# Altium PCB PCB_fina.pcbdoc
Units mil, origin at the board's own origin, x right, y up, seen from the top; angles counter-clockwise.
Board outline 3397.5 x 2742.17 mil, 2 copper layers (Top Layer, Bottom Layer); 12 components, 41 nets, 92 pads, 21 vias.
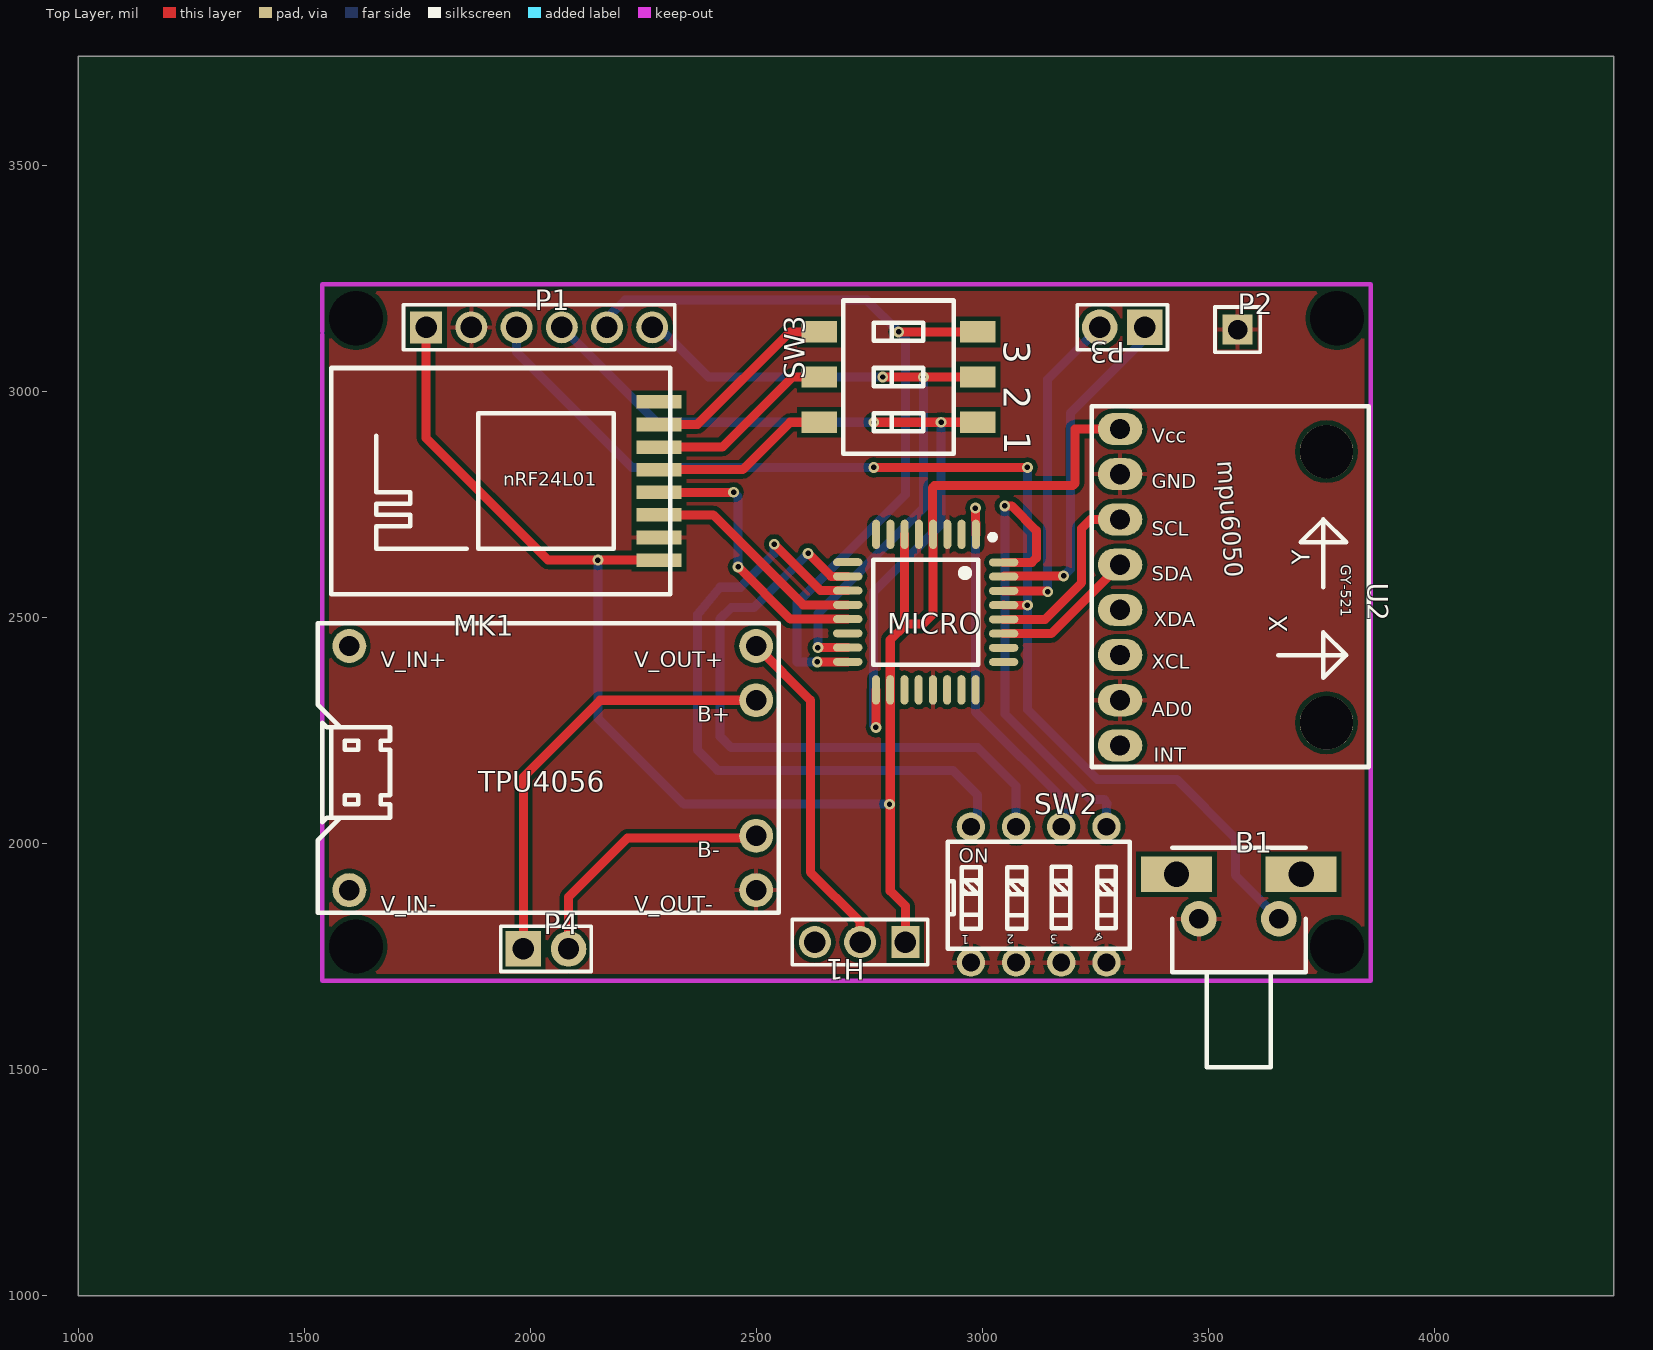
[diagram p0: Top Layer view]
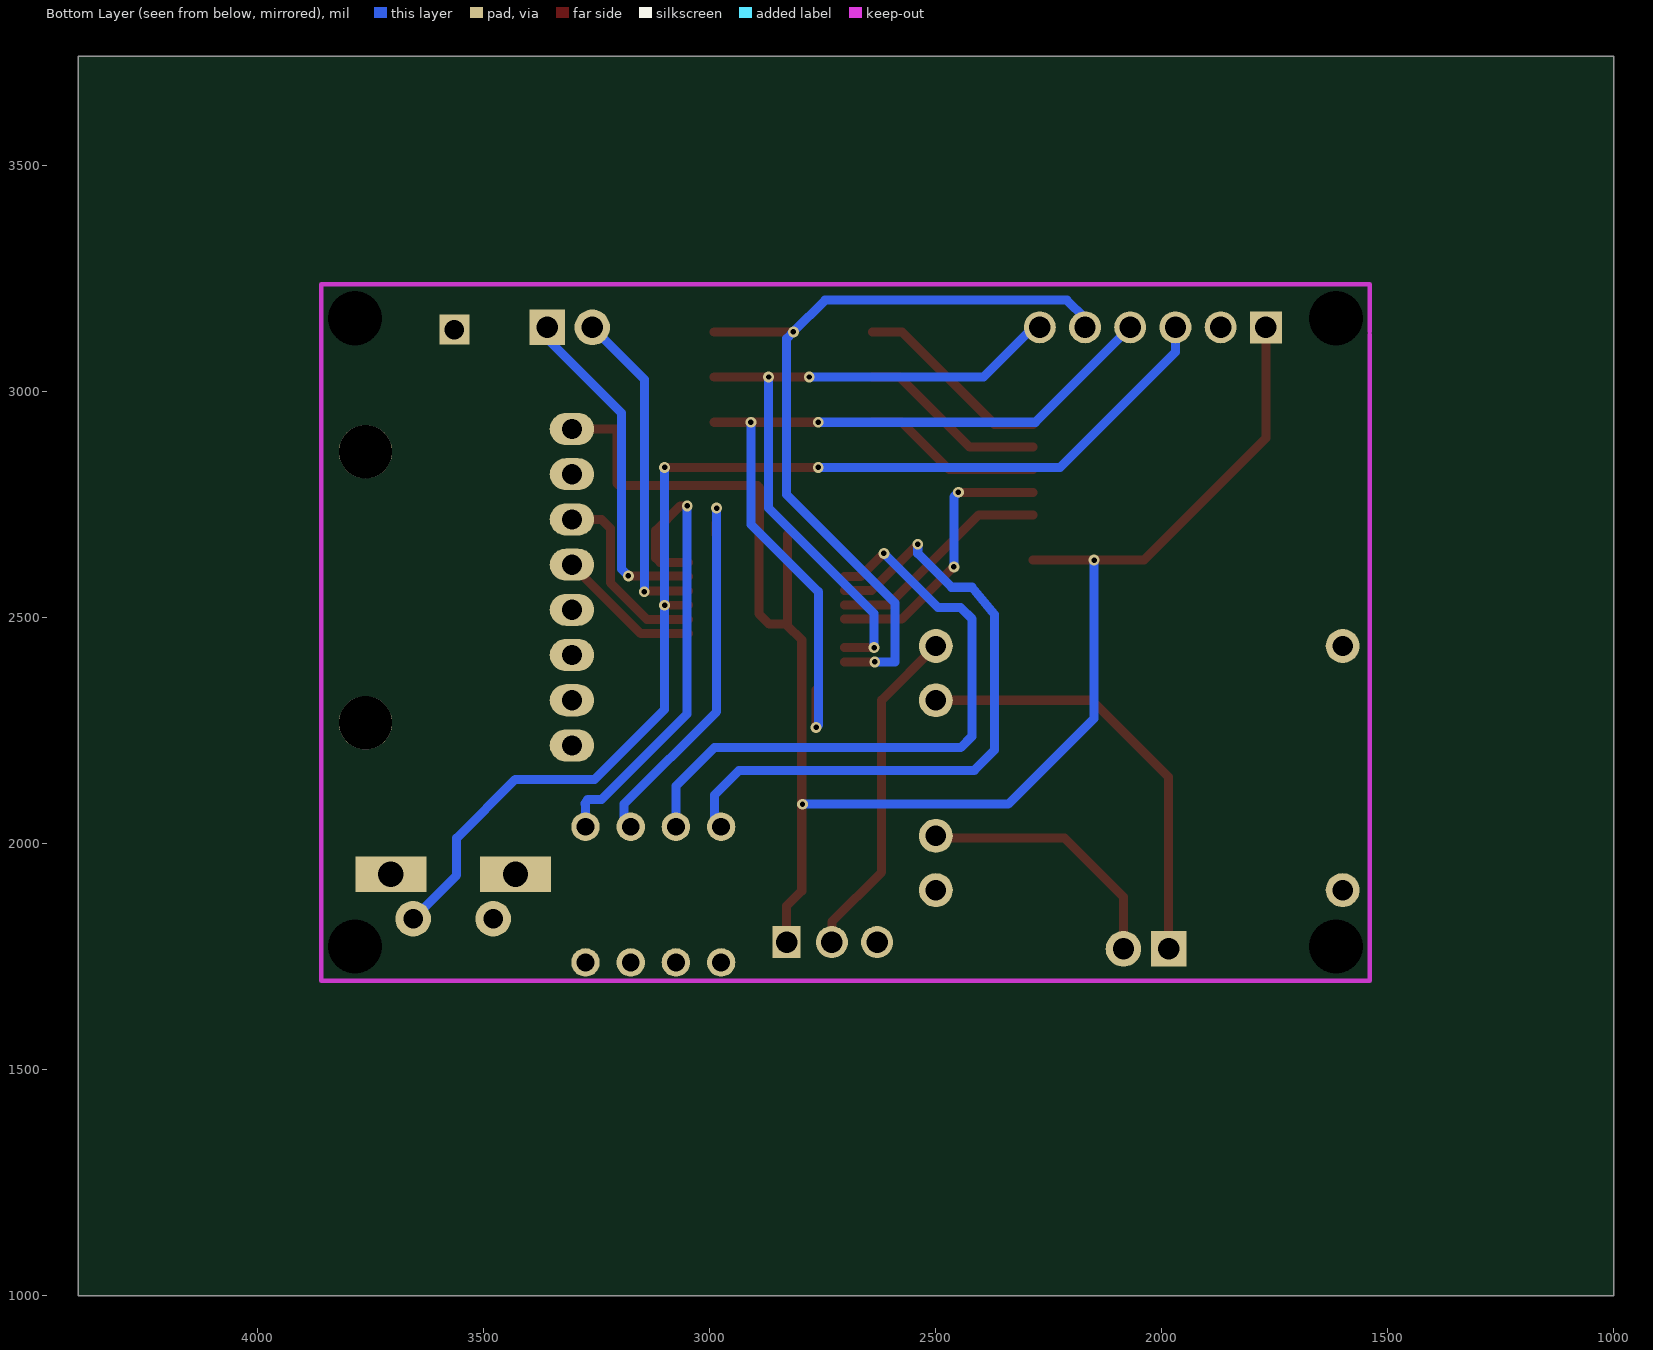
[diagram p1: Bottom Layer view, seen from below]

## Layer stack, top to bottom
Top Solder: solder mask 0.4, Solder Resist, Dk 3.5
Top Layer: signal copper 1.4
Dielectric1: dielectric 12.6, FR-4, Dk 4.8
Bottom Layer: signal copper 1.4
Bottom Solder: solder mask 0.4, Solder Resist, Dk 3.5

## Board outline
4397.5,1000 1000,1000 1000,3742.17 4397.5,3742.17

## Design rules (kind name [scope] priority, off if disabled: settings)
Clearance [All] p1: gap=10 ignorepadtopadclearanceinfootprint=FALSE except(0: Arc-Hole Track-Hole SMDPad-Hole THPad-Hole Via-Hole Fill-Hole Poly-Hole Region-Hole Text-Hole)
PolygonConnect [All] p1: connectstyle=Relief reliefconductorwidth=10 reliefentries=4 polygonreliefangle="90 Angle" airgapwidth=10
RoutingVias [All] p1: holewidth=28 width=50 viastyle="Through Hole" minholewidth=28 minwidth=50 maxholewidth=28 maxwidth=50
SolderMaskExpansion [All] p1: expansion=4 istentingtop=FALSE
Width [All] p1: maxlimit=10 minlimit=10 preferedwidth=10
30 further rules are at their usual default settings.

## Components (designator, comment, footprint, x,y, rotation, side; value= is the part's Value field where it differs from the comment)
B1 "PB-TH-RA" PB-TH-RA 3430,1932.17 r0 top
H1 "Header-Male-2.54_1x3" HDR-TH_3P-P2.54-V 2730,1782.17 r180 top
MICRO "ATMEGA8A-AU" TQFP-32_L7.0-W7.0-P0.80-LS9.0-BL 2875,2512.17 r180 top
MK1 "nrf24l01 smd" NRF24L01_SMD+ 2285,2802.17 r180 top
P1 "Header-Female-2.54_1x6" HDR-TH_6P-P2.54-V-F 2020,3142.17 r0 top
P2 "Header-Male-2.54_1x1" HDR-TH_1P-P2.54-V-M 3565,3137.17 r0 top
P3 "2.54mm 1*2P" HDR-TH_2P-P2.54-V-M 3310,3142.17 r180 top
P4 "2.54mm 1*2P" HDR-TH_2P-P2.54-V-M 2035,1767.17 r0 top
SW2 "DIP switchEI-04" SW-TH_DIPSWITCHEI-04 3125,1887.17 r0 top
SW3 "DIP_SWITCH_3_SMD" DIP-SWITCH-3_SMD 2815,3032.17 r90 top
TPU4056 "TP4056 MODULE" TP4056 1530,2487.17 r0 top
U2 "GY-521" GY-521 3305,2917.17 r270 top

## Footprints (in the part's own frame and the unit in brackets; to place one, negate y for a bottom-side part, rotate by r counter-clockwise, add the part's x,y. Pads: shape width x height; smd on the part's side, far side on the other; paste and mask are expansions set on the pad)
DIP-SWITCH-3_SMD [mm]
  rect 1.2x2 smd: 1(-2.54,-4.45) 2(0,-4.45) 3(2.54,-4.45) 4(2.54,4.45) 5(0,4.45) 6(-2.54,4.45)
  silkscreen extent -4.3,-3.1 4.3,3.1
GY-521 [mm]
  oval 1.8x2.5 hole 1.143: 1(0,0) 2(2.54,0) 3(5.08,0) 4(7.62,0) 5(10.16,0) 6(12.7,0) 7(15.24,0) 8(17.78,0)
  round 3 hole 3 unplated: ""(1.27,11.6) ""(16.51,11.6)
  silkscreen extent -1.27,-1.59 18.99,13.97
HDR-TH_1P-P2.54-V-M [mm]
  rect 1.7x1.7 hole 1.1: 1(0,0)
  silkscreen extent -1.27,-1.27 1.27,1.27
HDR-TH_2P-P2.54-V-M [mm]
  rect 2x2 hole 1.2: 1(-1.27,0)
  round 2 hole 1.2: 2(1.27,0)
  silkscreen extent -2.54,-1.27 2.54,1.27
HDR-TH_3P-P2.54-V [mm]
  rect 1.575x1.8 hole 1.2: 1(-2.54,0)
  round 1.8 hole 1.2: 2(0,0) 3(2.54,0)
  silkscreen extent -3.81,-1.27 3.81,1.27
HDR-TH_6P-P2.54-V-F [mm]
  rect 1.8x1.8 hole 1.2: 1(-6.35,0)
  round 1.8 hole 1.2: 2(-3.81,0) 3(-1.27,0) 4(1.27,0) 5(3.81,0) 6(6.35,0)
  silkscreen extent -7.62,-1.27 7.62,1.27
NRF24L01_SMD+ [mil]
  rect 100x30 smd: 1(0,175) 2(0,125) 3(0,75) 4(0,25) 5(0,-25) 6(0,-75) 7(0,-125) 8(0,-175)
  silkscreen extent -25,-250 725,250
PB-TH-RA [mm]
  round 2 hole 1.1: 1(1.25,-2.5) 2(5.75,-2.5)
  rect 4x2 hole 1.422: 3(7,0) 4(0,0)
  silkscreen extent -0.25,-10.85 7.25,1.5
SW-TH_DIPSWITCHEI-04 [mm]
  round 1.6 hole 1: 1(-3.81,-3.81) 2(-1.27,-3.81) 3(1.27,-3.81) 4(3.81,-3.81) 5(3.81,3.81) 6(1.27,3.81) 7(-1.27,3.81) 8(-3.81,3.81)
  silkscreen extent -5.1,-3.05 5.11,2.98
TP4056 [mil]
  round 75 hole 45: 1(70,-50) 2(70,-590) 3(970,-170) 4(970,-470) 5(970,-50) 6(970,-590)
  silkscreen extent 0,-640 1020,0
TQFP-32_L7.0-W7.0-P0.80-LS9.0-BL [mm]
  oval 0.45x1.65 smd: 1(-2.817,-4.369) 2(-2.017,-4.369) 3(-1.217,-4.369) 4(-0.417,-4.369) 5(0.381,-4.369) 6(1.181,-4.369) 7(1.981,-4.369) 8(2.781,-4.369) 17(2.791,4.369) 18(1.991,4.369) 19(1.191,4.369) 20(0.391,4.369) 21(-0.406,4.369) 22(-1.207,4.369) 23(-2.007,4.369) 24(-2.807,4.369)
  oval 1.65x0.45 smd: 9(4.381,-2.804) 10(4.381,-2.004) 11(4.381,-1.204) 12(4.381,-0.404) 13(4.381,0.394) 14(4.381,1.194) 15(4.381,1.994) 16(4.381,2.794) 25(-4.381,2.804) 26(-4.381,2.004) 27(-4.381,1.204) 28(-4.381,0.404) 29(-4.381,-0.394) 30(-4.381,-1.194) 31(-4.381,-1.994) 32(-4.381,-2.794)
  silkscreen extent -3.91,-4.36 2.94,2.95

## Free pads (board coordinates)
  round 60 hole 120: 1(1615,1772.17) 1(1615,3162.17) 1(3785,1772.17) 1(3785,3162.17)

## Via types
v1: diameter 24, hole 12, Top Layer to Bottom Layer, 21 vias

## Nets (pads, with @x,y where several pads share a name; then routed paths per layer and width w, separated by ;. In a path a pad name is that pad's centre, name@x,y a point inside that pad or via, vN(x,y) a via of type N, cw(c..) or ccw(c..) an arc to the next point about the centre after c; other vN are vias at no path point)
GND: B1.1 MICRO.3 MICRO.5 MICRO.21 MK1.2 P1.2 P2.1 SW2.1 SW2.2 SW2.3 SW2.4 TPU4056.6 U2.2 U2.7
H1_3: H1.3
MICRO_1: MICRO.1 SW2.6 | length 854.1
  Top Layer w20: v1(2985,2742.17) MICRO.1
  Bottom Layer w20: v1(2985,2742.17) 2985,2292.17 3190,2087.17 3190,2052.17 SW2.6
MICRO_2: MICRO.2
MICRO_7: MICRO.7
MICRO_8: MICRO.8
MICRO_9: MICRO.9
MICRO_10: MICRO.10 SW2.7 | length 1414.3
  Top Layer w20: v1(2615,2642.17) 2666.1,2591.07 MICRO.10
  Bottom Layer w20: v1(2615,2642.17) 2495,2522.17 2445,2522.17 2420,2497.17 2420,2237.17 2445,2212.17 2990,2212.17 3075,2127.17 SW2.7
MICRO_11: MICRO.11 SW2.8 | length 1491.8
  Top Layer w20: v1(2540,2662.17) 2642.6,2559.57 MICRO.11
  Bottom Layer w20: v1(2540,2662.17) 2540,2642.17 2465,2567.17 2425,2567.17 2420,2567.17 2370,2507.17 2370,2207.17 2415,2162.17 2935,2162.17 2990,2107.17 2990,2052.17 SW2.8
MICRO_14: MICRO.14
MICRO_15: MICRO.15 P1.6 SW3.2 | length 1527
  Top Layer w20: v1(2636.5,2433.67) MICRO.15 ; v1(2780,3032.17) v1(2870,3032.17) SW3.2
  Bottom Layer w20: P1.6 2285,3142.17 2395,3032.17 v1(2780,3032.17) ; v1(2636.5,2433.67) 2636.5,2508.66 2870,2742.17 v1(2870,3032.17)
MICRO_16: MICRO.16 P1.5 SW3.3 | length 1833.9
  Top Layer w20: v1(2635,2402.17) MICRO.16 ; v1(2815,3132.17) SW3.3
  Bottom Layer w20: P1.5 2170,3162.17 2210,3202.17 2745,3202.17 v1(2815,3132.17) 2830,3117.17 2830,2772.17 2590,2532.17 2590,2402.17 v1(2635,2402.17)
MICRO_17: MICRO.17 P1.4 SW3.1 | length 1829
  Top Layer w20: v1(2760,2932.17) v1(2909.07,2932.17) SW3.1 ; v1(2765,2257.17) MICRO.17
  Bottom Layer w20: P1.4 2280,2932.17 v1(2760,2932.17) ; v1(2765,2257.17) 2760,2262.17 2760,2557.17 2909.07,2706.24 v1(2909.07,2932.17)
MICRO_19: MICRO.19
MICRO_20: MICRO.20
MICRO_22: MICRO.22
MICRO_23: MICRO.23
MICRO_24: MICRO.24
MICRO_25: MICRO.25
MICRO_26: MICRO.26
MICRO_27: MICRO.27 U2.4 | length 320.6
  Top Layer w20: MICRO.27 3152.6,2464.77 U2.4
MICRO_28: MICRO.28 U2.3 | length 455.9
  Top Layer w20: MICRO.28@3069.1,2496.27 MICRO.28 3139.1,2496.27 3220,2577.17 3220,2697.17 3240,2717.17 U2.3 U2.3@3290,2717.17
MICRO_29: B1.2 MICRO.29 P1.3 | length 2674.5
  Top Layer w20: v1(2760,2832.17) v1(3100,2832.17) ; MICRO.29 v1(3100,2527.17)
  Bottom Layer w20: P1.3 1970,3087.17 2225,2832.17 v1(2760,2832.17) ; v1(3100,2832.17) v1(3100,2527.17) 3100,2297.17 3255,2142.17 3430,2142.17 3560,2012.17 3560,1930.12 B1.2
MICRO_30: MICRO.30 P3.2 | length 731
  Top Layer w20: MICRO.30 3143,2559.17 v1(3145,2557.17)
  Bottom Layer w20: v1(3145,2557.17) 3145,3027.17 P3.2
MICRO_31: MICRO.31 P3.1 | length 757.7
  Top Layer w20: MICRO.31 3049,2592.17 v1(3180,2592.17)
  Bottom Layer w20: v1(3180,2592.17) 3195,2607.17 3195,2952.17 3360,3117.17 P3.1
MICRO_32: MICRO.32 SW2.5 | length 1050.1
  Top Layer w20: MICRO.32 3110,2622.17 3120,2632.17 3120,2692.17 3065,2747.17 v1(3050,2747.17)
  Bottom Layer w20: v1(3050,2747.17) 3050,2287.17 3240,2097.17 3270,2097.17 3276.1,2088.27 3275,2082.17 SW2.5
MK1_3: MICRO.12 MK1.3 | length 500
  Top Layer w20: MK1.3 2405,2727.17 2604.1,2528.07 MICRO.12
MK1_4: MICRO.13 MK1.4 | length 624.5
  Top Layer w20: MK1.4 v1(2450,2777.17) ; v1(2460,2612.17) 2575.5,2496.67 MICRO.13
  Bottom Layer w20: v1(2450,2777.17) 2460,2767.17 v1(2460,2612.17)
MK1_5: MK1.5 SW3.6 | length 398.3
  Top Layer w20: MK1.5 2470,2827.17 2575,2932.17 SW3.6
MK1_6: MK1.6 SW3.5 | length 419
  Top Layer w20: MK1.6 2425,2877.17 2580,3032.17 SW3.5
MK1_7: MK1.7 SW3.4 | length 439.7
  Top Layer w20: MK1.7 2370,2927.17 2575,3132.17 SW3.4
MK1_8: MK1.8
TPU4056_1: TPU4056.1
TPU4056_2: TPU4056.2
TPU4056_3: P4.1 TPU4056.3 | length 965.4
  Top Layer w20: P4.1 1985,2147.17 2155,2317.17 TPU4056.3
TPU4056_4: P4.2 TPU4056.4 | length 585.9
  Top Layer w20: P4.2 2085,1882.17 2215,2012.17 2495,2012.17 TPU4056.4
TPU4056_5: H1.2 TPU4056.5 | length 750.3
  Top Layer w20: TPU4056.5 2620,2317.17 2620,1937.17 2730,1827.17 H1.2
U2_5: U2.5
U2_6: U2.6
U2_8: U2.8
VCC: H1.1 MICRO.4 MICRO.6 MICRO.18 MK1.1 P1.1 U2.1 | length 3765.3
  Top Layer w20: P1.1 1770,2897.17 2040,2627.17 v1(2150,2627.17) MK1.1 ; 2828.5,2485.67 2868.5,2485.67 2891.4,2508.57 MICRO.4 2890,2685.57 2890,2787.17 2895,2792.17 3200,2792.17 3205,2797.17 3205,2917.17 U2.1 ; MICRO.6 2828.5,2482.47 2796.6,2450.57 MICRO.18 2796.6,1895.57 2830,1862.17 H1.1
  Bottom Layer w20: v1(2150,2627.17) 2150,2277.17 2340,2087.17 v1(2795,2087.17)
pads on no net: B1.3 B1.4 U2.

## Polygon pours and split planes (outlines as drawn)
GND on Top Layer "Top Layer-GND" (solid, pour order 0): 3865,3232.17 3865,1712.17 3855,1702.17 1540,1702.17 1540,3242.17

## Text inside footprints (layer, text, board x,y; h text height)
MK1: Top Overlay "nRF24L01" at 1940,2792.17 h30
SW2: Top Overlay "1" at 2971.2,1797.81 h19.68 r180; Top Overlay "2" at 3070.7,1798.21 h19.68 r180; Top Overlay "3" at 3167.5,1798.21 h19.68 r180; Top Overlay "ON" at 2948.2,1958.02 h31.5; Top Overlay "4" at 3270.29,1795.53 h19.68 r144
SW3: Top Overlay "1" at 3048.47,2912.17 h59.05 r270; Top Overlay "2" at 3047.67,3012.17 h59.05 r270; Top Overlay "3" at 3047.67,3112.17 h59.05 r270
TPU4056: Top Overlay "V_IN-" at 1670,1849.67 h35; Top Overlay "V_OUT-" at 2230,1849.67 h35; Top Overlay "B-" at 2370,1969.67 h35; Top Overlay "B+" at 2370,2269.67 h35; Top Overlay "V_OUT+" at 2230,2389.67 h35; Top Overlay "V_IN+" at 1670,2389.67 h35
U2: Top Overlay "mpu6050" at 3520.36,2845.79 h39.37 r274; Top Overlay "X" at 3674.68,2467.17 h39.37 r90; Top Overlay "Y" at 3724.68,2617.17 h39.37 r90; Top Overlay "Vcc" at 3375,2886.42 h31.5; Top Overlay "GND" at 3375,2786.42 h31.5; Top Overlay "SCL" at 3375,2681.42 h31.5; Top Overlay "SDA" at 3375,2581.42 h31.5; Top Overlay "XDA" at 3380,2481.42 h31.5; Top Overlay "XCL" at 3375,2386.42 h31.5; Top Overlay "AD0" at 3375,2281.42 h31.5; Top Overlay "INT" at 3380,2181.42 h31.5